# Altium PCB PCB1.PcbDoc
Units mm, origin at the board's own origin, x right, y up, seen from the top; angles counter-clockwise.
Board outline 100 x 60 mm, 2 copper layers (Top Layer, Bottom Layer); 21 components, 53 nets, 117 pads, 4 vias.
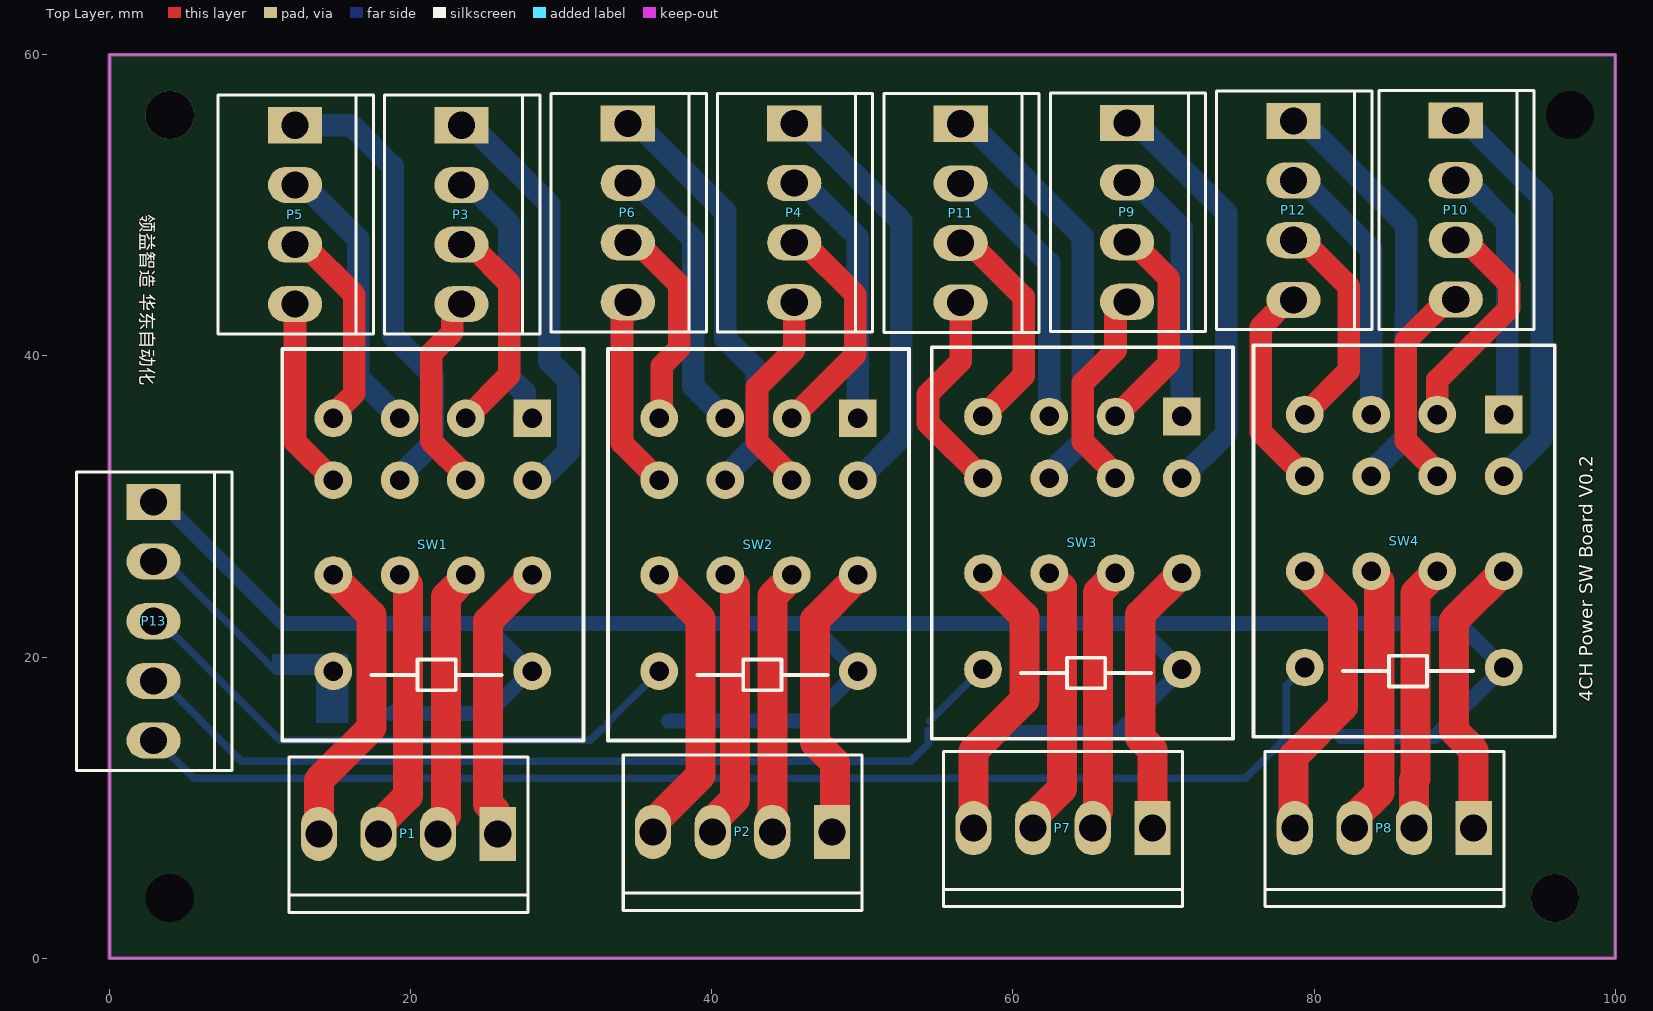
[diagram p0: Top Layer view]
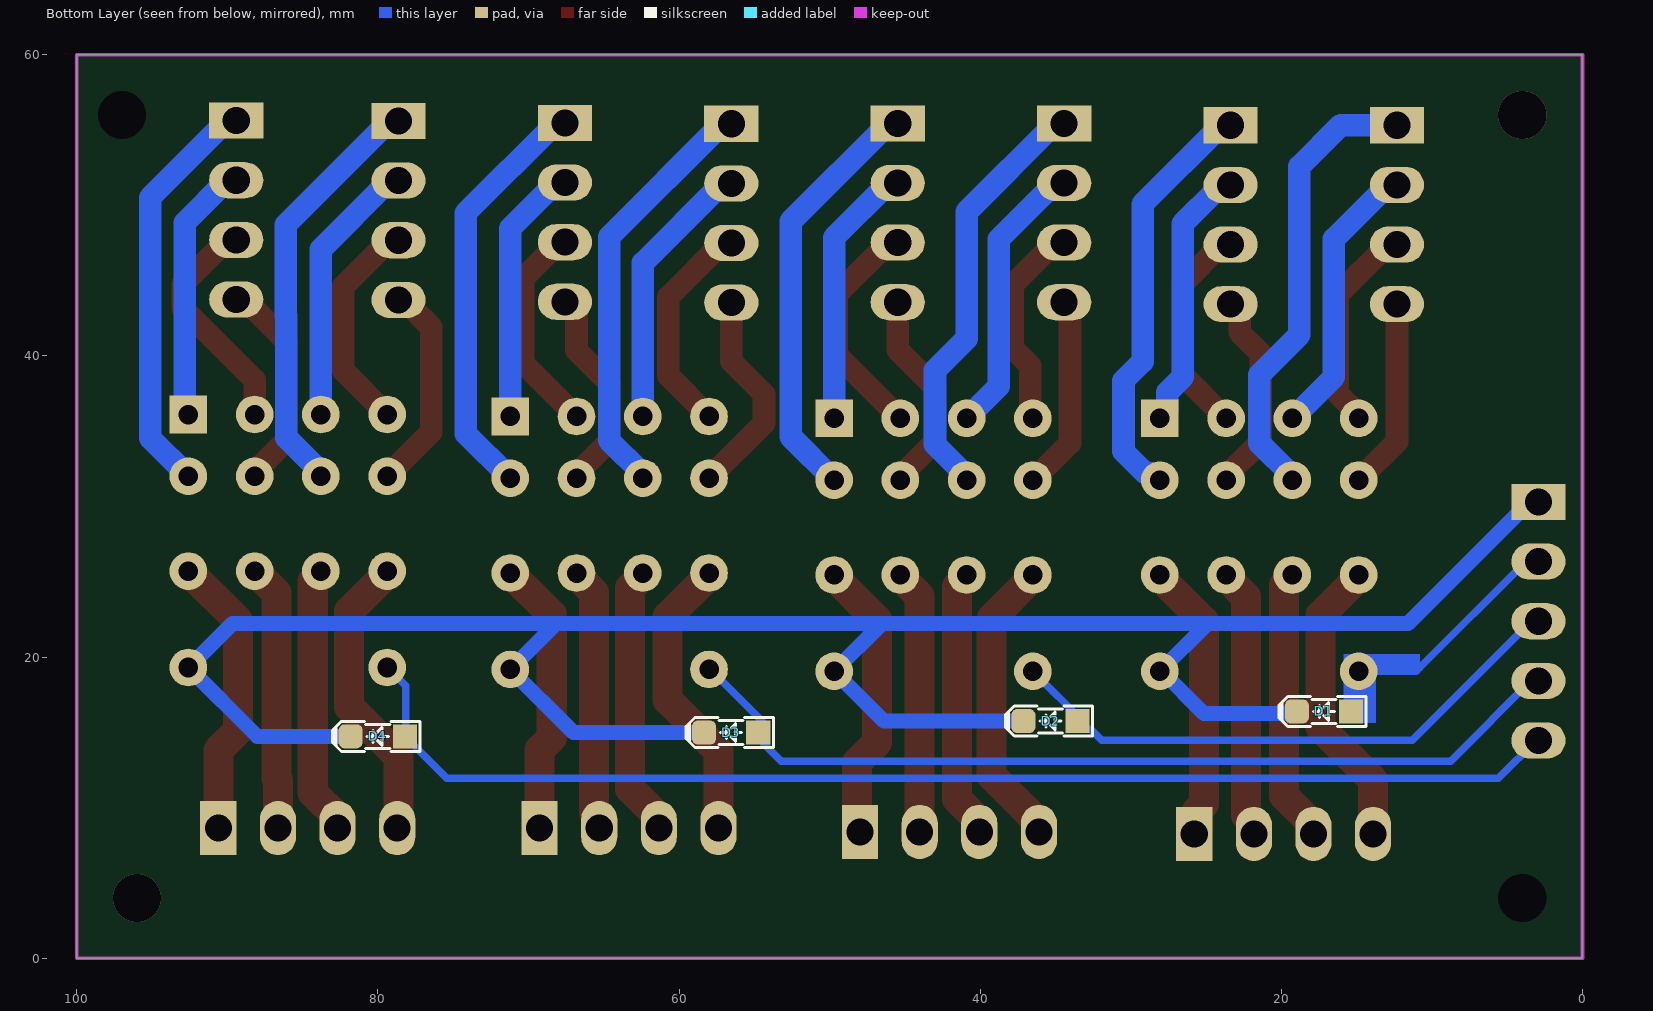
[diagram p1: Bottom Layer view, seen from below]
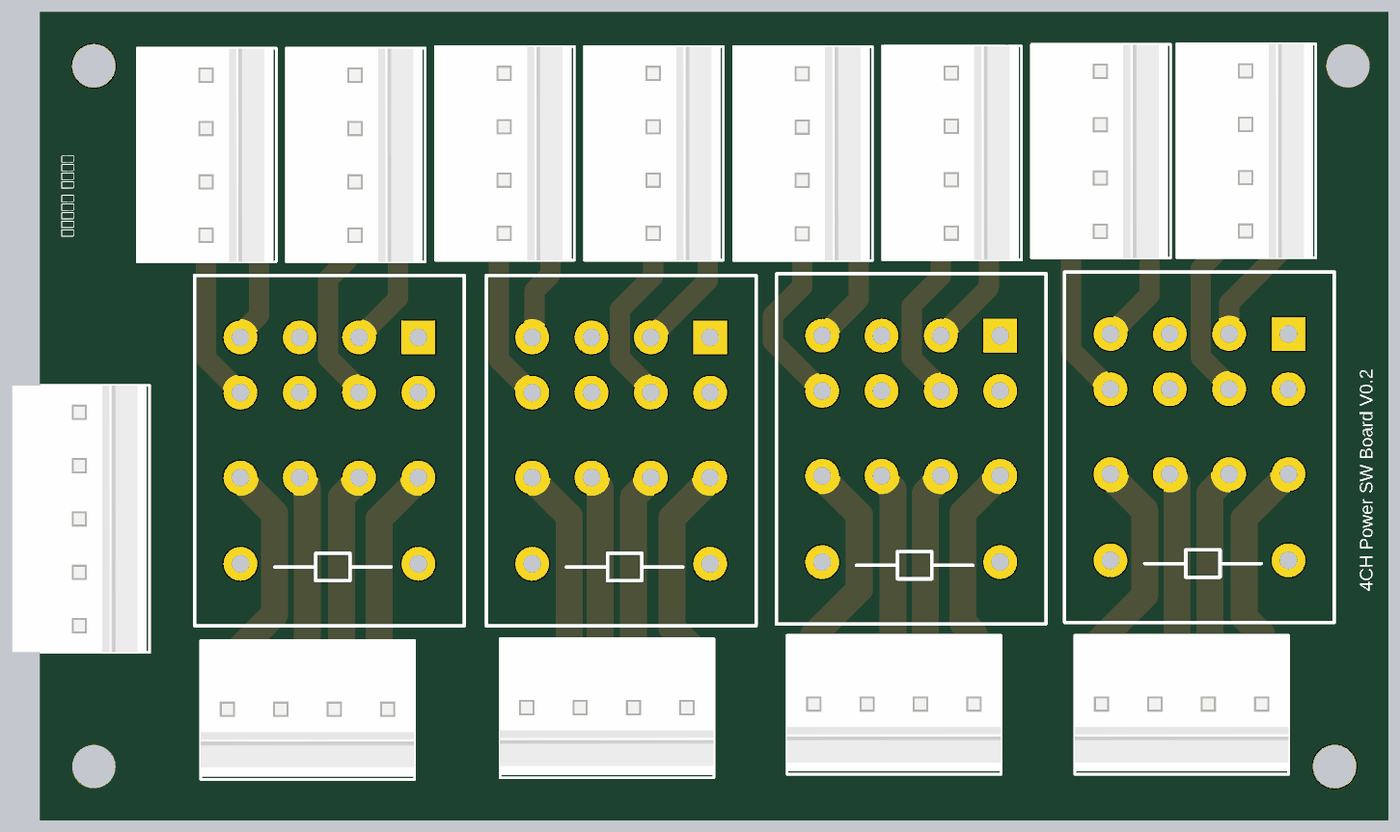
[diagram p2: 3D render of the assembled board from above, using the file's embedded part models]
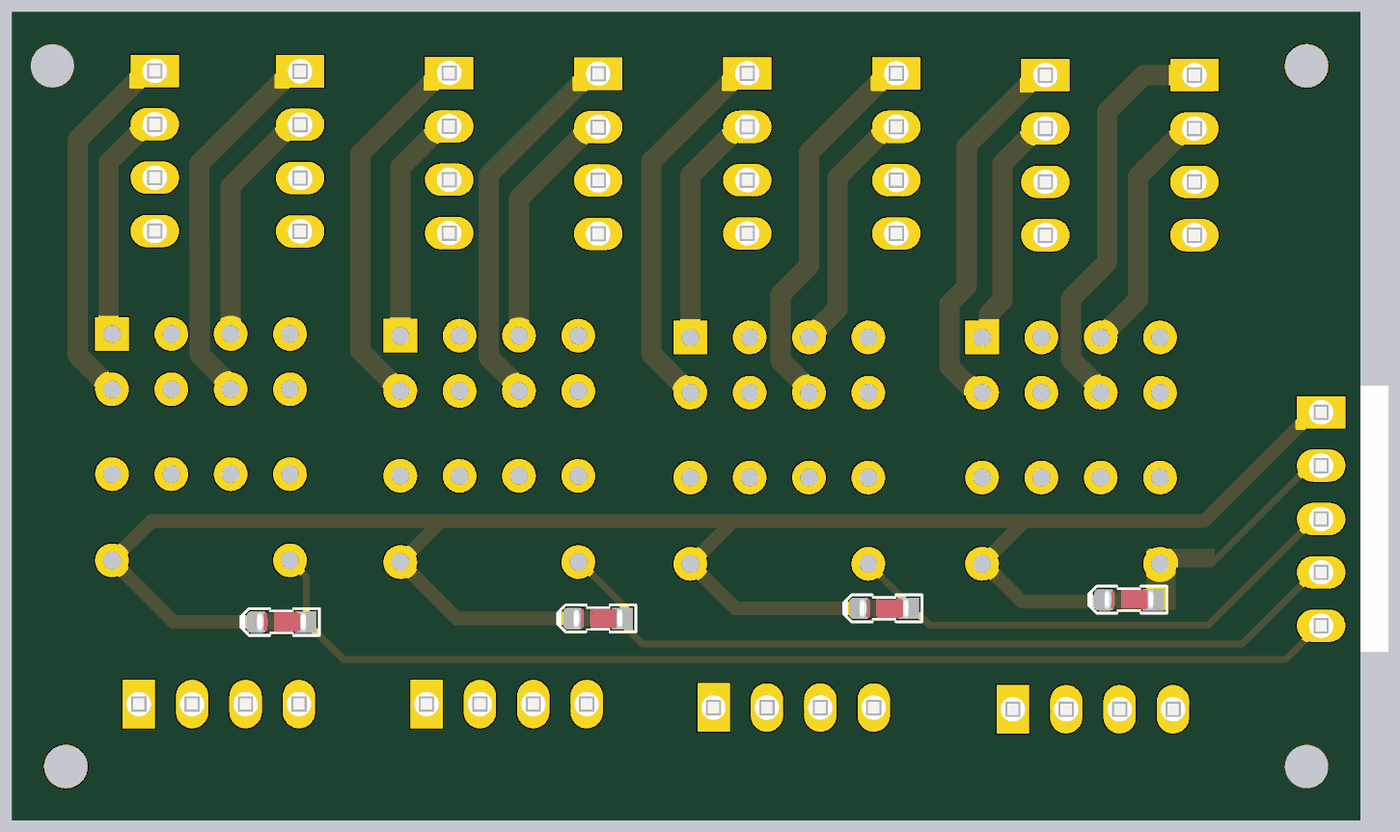
[diagram p3: 3D render of the assembled board from below, using the file's embedded part models]

## Layer stack, top to bottom
Top Solder: solder mask 0.0102, Solder Resist, Dk 3.5
Top Layer: signal copper 0.0356
Dielectric 1: dielectric 0.32, FR-4, Dk 4.8
Bottom Layer: signal copper 0.0356
Bottom Solder: solder mask 0.0102, Solder Resist, Dk 3.5

## Board outline
0,0 100,0 100,60 0,60

## Design rules (kind name [scope] priority, off if disabled: settings)
Clearance [All] p1: gap=0.1 ignorepadtopadclearanceinfootprint=FALSE
PolygonConnect [All] p1: connectstyle=Relief reliefconductorwidth=0.254 reliefentries=4 polygonreliefangle="90 Angle" airgapwidth=0.254
RoutingVias [All] p1: holewidth=0.711 width=1.27 viastyle="Through Hole" minholewidth=0.711 minwidth=1.27 maxholewidth=0.711 maxwidth=1.27
SolderMaskExpansion [All] p1: expansion=0.102 istentingtop=FALSE
Width [All] p1: maxlimit=5 minlimit=0.254 preferedwidth=0.254
30 further rules are at their usual default settings.

## Components (designator, comment, footprint, x,y, rotation, side; value= is the part's Value field where it differs from the comment)
D1 "1N4148" D_SOD80 17.167,16.383 r0 bottom
D2 "1N4148" D_SOD80 35.328,15.748 r0 bottom
D3 "1N4148" D_SOD80 56.537,14.986 r0 bottom
D4 "1N4148" D_SOD80 80.01,14.732 r0 bottom
P1 "CONN_PWL_4" PWL_4 19.841,8.255 r180 top
P2 "CONN_PWL_4" PWL_4 42.037,8.382 r180 top
P3 "CONN_PWL_4" PWL_4 23.371,49.374 r270 top
P4 "CONN_PWL_4" PWL_4 45.475,49.501 r270 top
P5 "CONN_PWL_4" PWL_4 12.319,49.374 r270 top
P6 "CONN_PWL_4" PWL_4 34.423,49.501 r270 top
P7 "CONN_PWL_4" PWL_4 63.321,8.636 r180 top
P8 "CONN_PWL_4" PWL_4 84.657,8.636 r180 top
P9 "CONN_PWL_4" PWL_4 67.578,49.53 r270 top
P10 "CONN_PWL_4" PWL_4 89.408,49.686 r270 top
P11 "CONN_PWL_4" PWL_4 56.526,49.478 r270 top
P12 "CONN_PWL_4" PWL_4 78.63,49.657 r270 top
P13 "CONN_PWL_5" PWL_5 2.921,22.375 r270 top
SW1 "MY4(Z)IN-D2(S)" RY-HF18FF4 28.067,35.85 r0 top
SW2 "MY4(Z)IN-D2(S)" RY-HF18FF4 49.699,35.85 r0 top
SW3 "MY4(Z)IN-D2(S)" RY-HF18FF4 71.205,35.977 r0 top
SW4 "MY4(Z)IN-D2(S)" RY-HF18FF4 92.583,36.104 r0 top

## Footprints (in the part's own frame and the unit in brackets; to place one, negate y for a bottom-side part, rotate by r counter-clockwise, add the part's x,y. Pads: shape width x height; smd on the part's side, far side on the other; paste and mask are expansions set on the pad)
D_SOD80 [mm] "SOD-80 MINI-MELF 3.6X1.6mm, LL-34, LL4148"
  rect 1.6x1.6 smd: 1(-1.8,0)
  rrect50% 1.6x1.6 smd: 2(1.8,0)
  Top Layer pour cut-out: -1.016,1.016 1.016,1.016 1.016,-1.016 -1.016,-1.016
  silkscreen extent -2.8,-1 3,1, body extent -1.85,-0.8 1.85,0.8, height 2
PWL_4 [mm] "Connector; Header; 4 Position"
  rect 2.4x3.6 hole 1.8: 1(-5.94,0)
  oval 2.4x3.6 hole 1.8: 2(-1.98,0) 3(1.98,0) 4(5.94,0)
  silkscreen extent -7.94,-5.1 7.92,5.21, body extent -7.92,-5 7.92,5, height 13.5
PWL_5 [mm] "Connector; Header; 5 Position"
  rect 2.4x3.6 hole 1.8: 1(-7.92,0)
  oval 2.4x3.6 hole 1.8: 2(-3.96,0) 3(0,0) 4(3.96,0) 5(7.92,0)
  silkscreen extent -9.92,-5.1 9.9,5.21, body extent -9.9,-5 9.9,5, height 13.5
RY-HF18FF4 [mm]
  rect 2.5x2.5 hole 1.3: 1(0,0)
  round 2.5 hole 1.3: 2(-4.4,0) 3(-8.8,0) 4(-13.2,0) 5(0,-4.1) 6(-4.4,-4.1) 7(-8.8,-4.1) 8(-13.2,-4.1) 9(0,-10.4) 10(-4.4,-10.4) 11(-8.8,-10.4) 12(-13.2,-10.4) 13(-13.2,-16.8) 14(0,-16.8)
  silkscreen extent -16.6,-21.4 3.4,4.6

## Part data
D1 D2 D3 D4: library part DIODE_SMD_1N4148, "DIODE, FAST SWTICHING, 0.3A, 0.5W", ASSEMBLY=ASSEMBLY, DESC=DESCRIPTION, MANF=MANF, MANF_P#=1N4148, PARAM=75V, PARAM2="300mA, 0.5W", PRICE=PRICE
P1 P2 P3 P4 P5 P6 P7 P8 P9 P10 P11 P12: "Power Terminal 4pin,Header, 4-Pin"
P13: "Power Terminal 5pin,Header, 5-Pin"
SW1 SW2 SW3 SW4: library part MY4NJ-24VDC, "Omron 欧姆龙 功率继电器, MY4系列, 24V 直流线圈电压, 切换电流5A, 4 刀双掷, 插入 安装", MY4NJ-24VDC=MY4NJ-24VDC

## Via types
v1: diameter 3.2, hole 3.2, Top Layer to Bottom Layer, 2 vias
v2: diameter 0.711/0.711 (per signal layer), hole 3.2, Top Layer to Bottom Layer, 2 vias

## Nets (pads, with @x,y where several pads share a name; then routed paths per layer and width w, separated by ;. In a path a pad name is that pad's centre, name@x,y a point inside that pad or via, vN(x,y) a via of type N, cw(c..) or ccw(c..) an arc to the next point about the centre after c; other vN are vias at no path point)
Control1: D1.1 P13.2 SW1.13 | length 17.9
  Bottom Layer w0.5: P13.2 3.764,26.335 10.795,19.304 11.049,19.05 SW1.13 ; SW1.13@15.143,19.177 15.367,18.953 D1.1
Control2: D2.1 P13.3 SW2.13 | length 40.2
  Bottom Layer w0.5: P13.3@1.651,22.502 P13.3@2.921,22.502 ; P13.3 3.406,22.375 11.303,14.478 31.927,14.478 32.647,15.198 32.978,15.198 33.07,15.29 33.07,15.621 SW2.13
Control3: D3.1 P13.4 SW3.13 | length 61.3
  Bottom Layer w0.5: P13.4@1.651,18.542 3.302,18.542 8.763,13.081 53.213,13.081 54.369,14.237 D3.1@54.369,15.148 ; D3.1@54.472,15.737 57.912,19.177 SW3.13
Control4: D4.1 P13.5 SW4.13 | length 83.9
  Bottom Layer w0.5: P13.5@1.651,14.582 2.944,14.582 5.588,11.938 75.416,11.938 78.158,14.68 78.158,18.078 SW4.13
NetP1_1: P1.1 SW1.9 | length 18.7
  Top Layer w2: P1.1 25.581,8.455 25.581,9.792 25.146,10.227 25.146,22.394 28.067,25.315 SW1.9
NetP1_2: P1.2 SW1.10 | length 18
  Top Layer w2: P1.2 21.821,8.963 22.352,9.494 22.352,24 23.667,25.315 SW1.10
NetP1_3: P1.3 SW1.11 | length 18.2
  Top Layer w2: P1.3 17.861,8.821 19.812,10.772 19.812,24.77 19.267,25.315 SW1.11
NetP1_4: P1.4 SW1.12 | length 19.7
  Top Layer w2: P1.4 13.901,11.811 17.399,15.309 17.399,22.783 14.867,25.315 SW1.12
NetP2_1: P2.1 SW2.9 | length 18.9
  Top Layer w2: P2.1 48.177,8.582 48.177,12.998 46.863,14.312 46.863,22.478 49.699,25.315 SW2.9
NetP2_2: P2.2 SW2.10 | length 17.6
  Top Layer w2: P2.2 44.017,24.032 45.299,25.315 SW2.10
NetP2_3: P2.3 SW2.11 | length 17.9
  Top Layer w2: P2.3@39.98,8.459 39.98,9.014 41.529,10.562 41.529,24.685 40.899,25.315 SW2.11
NetP2_4: P2.4 SW2.12 | length 19.5
  Top Layer w2: P2.4 36.097,8.982 39.243,12.128 39.243,22.571 36.499,25.315 SW2.12
NetP3_1: P3.1 SW1.5 | length 28.2
  Bottom Layer w1.5: P3.1 23.971,55.314 29.21,50.075 29.21,39.624 30.48,38.354 30.48,33.655 29.075,32.25 28.838,32.25 28.338,31.75 SW1.5
NetP3_2: P3.2 SW1.1 | length 17.8
  Bottom Layer w1.5: P3.2 23.665,51.06 24.265,51.06 26.543,48.782 26.543,38.608 27.567,37.584 27.567,36.35 SW1.1
NetP3_3: P3.3 SW1.2 | length 14.4
  Top Layer w1.5: P3.3 23.971,47.394 26.543,44.822 26.543,38.726 SW1.2
NetP3_4: P3.4 SW1.6 | length 13.6
  Top Layer w1.5: P3.4 23.181,43.434 22.765,43.018 22.765,41.561 21.367,40.163 21.367,34.321 23.667,32.021 SW1.6
NetP4_1: P4.1 SW2.5 | length 28.2
  Bottom Layer w1.5: P4.1 46.075,55.441 52.578,48.938 52.578,34.629 SW2.5
NetP4_2: P4.2 SW2.1 | length 17.7
  Bottom Layer w1.5: P4.2 46.075,51.481 49.699,47.856 SW2.1
NetP4_3: P4.3 SW2.2 | length 15.5
  Top Layer w1.5: SW2.2 49.53,40.081 49.53,44.066 46.075,47.521 P4.3
NetP4_4: P4.4 SW2.6 | length 13.8
  Top Layer w1.5: SW2.6 45.299,32.021 42.999,34.321 42.999,37.919 45.475,40.395 P4.4
NetP5_1: P5.1 SW1.7 | length 30.5
  Bottom Layer w1.5: P5.1 16.06,55.314 18.796,52.578 18.796,41.402 21.463,38.735 21.463,34.217 19.267,32.021 SW1.7
NetP5_2: P5.2 SW1.3 | length 18.7
  Bottom Layer w1.5: P5.2 12.919,51.354 16.51,47.763 16.51,38.607 SW1.3
NetP5_3: P5.3 SW1.4 | length 14.1
  Top Layer w1.5: P5.3 12.919,47.394 16.256,44.057 16.256,37.51 14.867,36.121 SW1.4
NetP5_4: P5.4 SW1.8 | length 12.7
  Top Layer w1.5: P5.4 12.319,34.298 SW1.8
NetP6_1: P6.1 SW2.7 | length 28.5
  Bottom Layer w1.5: P6.1 35.023,55.441 40.894,49.57 40.894,41.148 42.999,39.043 42.999,34.121 40.899,32.021 SW2.7
NetP6_2: P6.2 SW2.3 | length 18.7
  Bottom Layer w1.5: P6.2 35.023,51.481 38.772,47.732 38.772,37.978 SW2.3
NetP6_3: P6.3 SW2.4 | length 14
  Top Layer w1.5: P6.3 35.023,47.521 37.846,44.698 37.846,40.513 36.683,39.35 36.683,36.034 SW2.4
NetP6_4: P6.4 SW2.8 | length 13
  Top Layer w1.5: P6.4 34.036,43.174 34.036,34.213 SW2.8
NetP7_1: P7.1 SW3.9 | length 18.4
  Top Layer w2: P7.1 69.261,13.839 68.453,14.647 68.453,22.825 SW3.9
NetP7_2: P7.2 SW3.10 | length 17.6
  Top Layer w2: P7.2 65.301,9.344 65.659,9.702 65.659,24.296 66.805,25.442 SW3.10
NetP7_3: P7.3 SW3.11 | length 18.1
  Top Layer w2: P7.3 61.341,9.344 63.246,11.249 63.246,24.6 62.405,25.442 SW3.11
NetP7_4: P7.4 SW3.12 | length 19.5
  Top Layer w2: P7.4 57.381,13.764 60.765,17.148 60.765,22.681 58.005,25.442 SW3.12
NetP8_1: P8.1 SW4.9 | length 19
  Top Layer w2: P8.1 90.597,13.803 89.281,15.119 89.281,22.402 SW4.9
NetP8_2: P8.2 SW4.10 | length 17.7
  Top Layer w2: P8.2 86.637,11.834 86.741,11.938 86.741,24.262 SW4.10
NetP8_3: P8.3 SW4.11 | length 18
  Top Layer w2: P8.3 82.677,9.344 84.328,10.995 84.328,25.024 83.783,25.569 SW4.11
NetP8_4: P8.4 SW4.12 | length 19.5
  Top Layer w2: P8.4 78.64,8.713 78.64,13.421 81.915,16.695 81.915,23.037 79.383,25.569 SW4.12
NetP9_1: P9.1 SW3.5 | length 27.9
  Bottom Layer w1.5: P9.1 68.178,55.47 74.168,49.48 74.168,34.84 SW3.5
NetP9_2: P9.2 SW3.1 | length 17.4
  Bottom Layer w1.5: P9.2 68.178,51.51 71.205,48.484 SW3.1
NetP9_3: P9.3 SW3.2 | length 14.4
  Top Layer w1.5: SW3.2 70.358,39.53 70.358,45.127 67.935,47.55 P9.3
NetP9_4: P9.4 SW3.6 | length 14
  Top Layer w1.5: SW3.6 66.805,32.148 64.643,34.309 64.643,38.202 66.806,40.365 66.806,43.174 67.222,43.59 P9.4
NetP10_1: P10.1 SW4.5 | length 27.4
  Bottom Layer w1.5: P10.1 90.008,55.626 95.123,50.511 95.123,34.544 SW4.5
NetP10_2: P10.2 SW4.1 | length 17.4
  Bottom Layer w1.5: P10.2 90.008,51.666 92.837,48.837 92.837,36.358 SW4.1
NetP10_3: P10.3 SW4.2 | length 15.4
  Top Layer w1.5: SW4.2 88.183,38.399 92.964,43.18 92.964,44.75 90.008,47.706 P10.3
NetP10_4: P10.4 SW4.6 | length 14.3
  Top Layer w1.5: SW4.6 88.183,32.275 86.083,34.375 86.083,40.98 88.535,43.431 89.093,43.431 P10.4
NetP11_1: P11.1 SW3.7 | length 28.2
  Bottom Layer w1.5: P11.1 57.126,55.418 64.643,47.901 64.643,34.386 62.405,32.148 SW3.7
NetP11_2: P11.2 SW3.3 | length 18.3
  Bottom Layer w1.5: P11.2 57.126,51.458 62.405,46.18 SW3.3
NetP11_3: P11.3 SW3.4 | length 14.7
  Top Layer w1.5: P11.3 57.126,47.498 60.706,43.918 60.706,38.678 SW3.4
NetP11_4: P11.4 SW3.8 | length 14.1
  Top Layer w1.5: P11.4 56.526,39.635 54.356,37.465 54.356,35.526 SW3.8
NetP12_1: P12.1 SW4.7 | length 28
  Bottom Layer w1.5: P12.1 79.23,55.597 86.106,48.721 86.106,42.672 86.083,42.649 86.083,34.575 83.783,32.275 SW4.7
NetP12_2: P12.2 SW4.3 | length 18
  Bottom Layer w1.5: P12.2 79.23,51.637 83.783,47.084 SW4.3
NetP12_3: P12.3 SW4.4 | length 14.6
  Top Layer w1.5: P12.3 79.23,47.677 82.296,44.611 82.296,39.017 SW4.4
NetP12_4: P12.4 SW4.8 | length 14
  Top Layer w1.5: P12.4 78.274,43.717 76.454,41.897 76.454,34.933 SW4.8
VCC: D1.2 D2.2 D3.2 D4.2 P13.1 SW1.14 SW2.14 SW3.14 SW4.14 | length 159.5
  Bottom Layer w1: P13.1 3.521,30.295 4.221,29.595 11.591,22.225 24.892,22.225 ; D1.2@18.691,16.256 25.146,16.256 27.94,19.05 SW1.14 24.892,22.225 ; D1.2 D1.2@19.072,16.488 ; D2.2 46.397,15.748 SW2.14 46.524,22.225 ; D3.2 67.014,14.986 SW3.14@71.303,19.275 ; SW3.14 68.157,22.225 ; D4.2 88.011,14.732 SW4.14 89.662,22.225 68.157,22.225 ; 24.892,22.225 46.524,22.225 ; 46.524,22.225 68.157,22.225
copper on no net:
  other v1: 96,4 4,56
  other v2: 4,4 97,56

## Keep-outs
Keep-Out Layer:
  the board outline again, w0.254

## Other copper
Bottom Layer:
  rectangle net Control1: 13.716,15.621 15.875,20.193
  rectangle net Control1: 10.795,18.923 14.097,20.193

## Silkscreen, mask and mechanical layers (free items; w line width, h text height)
Top Overlay:
  text "领益智造 华东自动化" at 1.778,49.403 h1.52 r270
  text "4CH Power SW Board V0.2" at 98.806,17.018 h1.52 r90

## Dimensions
0,0 to 0,60 on Mechanical 1
0,0 to 100,0 on Mechanical 1